# Altium PCB PCB-ESP32-C3-RF-V1.0.PcbDoc (part 2 of 4)
Units mil, origin at the board's own origin, x right, y up, seen from the top; angles counter-clockwise.
Board outline 1166.03 x 1736.03 mil, 4 copper layers (L1, L2, L3, L4), stack 30.315 mil thick; 70 components, 58 nets, 232 pads, 398 vias.
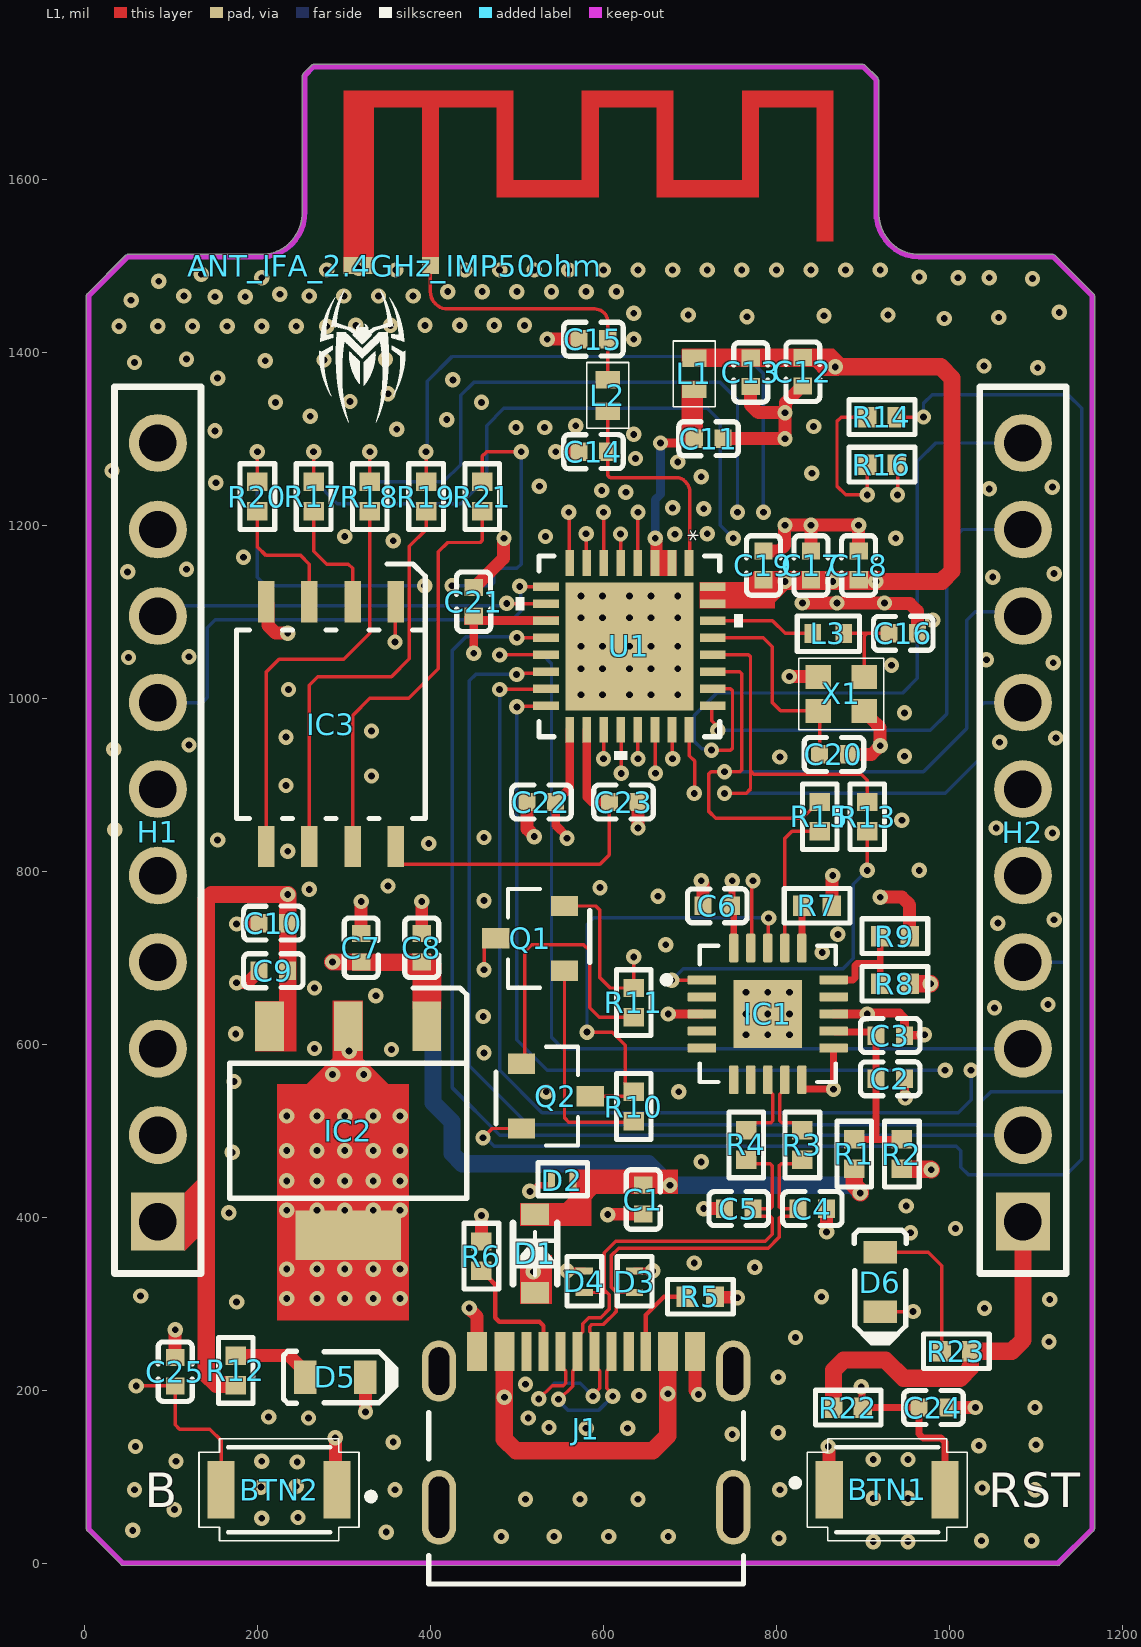
[diagram p0: L1 view]

## Part data (continued)
C18: library part CC0402KRX7R7BB103, "Multilayer Ceramic Capacitors MLCC - SMD/SMT 16V 0.01uF X7R 0402 10%", Case Code (Imperial)=0402, Case Code (Metric)=1005, Dielectric=X7R, Dielectric Material=Ceramic, LCSC Part=C327009, Manufacturer="Yageo Group", Max Operating Temperature=125°C, Min Operating Temperature=-55°C, Supplier Part Number=311-1042-1-ND, Temperature Coefficient=30ppm/°C, Tolerance=10%, Voltage=16V, Case/Package=0402, Category="Ceramic Capacitors", China RoHS=Compliant, ComponentLink1Description=https://datasheet.octopart.com:443/CC0402KRX7R7BB103-Yageo-datasheet-177165144.pdf?src-supplier=IHS, ComponentLink1URL=https://datasheet.octopart.com:443/CC0402KRX7R7BB103-Yageo-datasheet-177165144.pdf?src-supplier=IHS, ComponentLink2Description=https://datasheet.octopart.com:443/CC0402KRX7R7BB103-Yageo-datasheet-78855684.pdf?src-supplier=Upverter, ComponentLink2URL=https://datasheet.octopart.com:443/CC0402KRX7R7BB103-Yageo-datasheet-78855684.pdf?src-supplier=Upverter, ComponentLink3Description=https://datasheet.octopart.com/CC0402KRX7R7BB103-Yageo-datasheet-10883670.pdf, ComponentLink3URL=https://datasheet.octopart.com/CC0402KRX7R7BB103-Yageo-datasheet-10883670.pdf, ComponentLink4Description=https://datasheet.octopart.com:443/CC0402KRX7R7BB103-Yageo-datasheet-147453679.pdf?src-supplier=Newark, ComponentLink4URL=https://datasheet.octopart.com:443/CC0402KRX7R7BB103-Yageo-datasheet-147453679.pdf?src-supplier=Newark, ComponentLink5Description=https://datasheet.octopart.com:443/CC0402KRX7R7BB103-Phycomp-datasheet-499490.pdf?src-supplier=Newark, ComponentLink5URL=https://datasheet.octopart.com:443/CC0402KRX7R7BB103-Phycomp-datasheet-499490.pdf?src-supplier=Newark, ComponentLink6Description=https://datasheet.octopart.com:443/CC0402KRX7R7BB103-Yageo-datasheet-15895757.pdf?src-supplier=Newark, ComponentLink6URL=https://datasheet.octopart.com:443/CC0402KRX7R7BB103-Yageo-datasheet-15895757.pdf?src-supplier=Newark, ComponentLink7Description=https://datasheet.octopart.com:443/CC0402KRX7R7BB103-Yageo-datasheet-182050773.pdf?src-supplier=Newark, ComponentLink7URL=https://datasheet.octopart.com:443/CC0402KRX7R7BB103-Yageo-datasheet-182050773.pdf?src-supplier=Newark, ComponentLink8Description=https://datasheet.octopart.com:443/CC0402KRX7R7BB103-Yageo-datasheet-182050772.pdf?src-supplier=Newark, ComponentLink8URL=https://datasheet.octopart.com:443/CC0402KRX7R7BB103-Yageo-datasheet-182050772.pdf?src-supplier=Newark, ComponentLink9Description=https://datasheet.octopart.com:443/CC0402KRX7R7BB103-Yageo-datasheet-62336348.pdf?src-supplier=Farnell, ComponentLink9URL=https://datasheet.octopart.com:443/CC0402KRX7R7BB103-Yageo-datasheet-62336348.pdf?src-supplier=Farnell, ComponentLink10Description=https://datasheet.octopart.com:443/CC0402KRX7R7BB103-Yageo-datasheet-151948686.pdf?src-supplier=Farnell, ComponentLink10URL=https://datasheet.octopart.com:443/CC0402KRX7R7BB103-Yageo-datasheet-151948686.pdf?src-supplier=Farnell, ComponentLink11Description=https://datasheet.octopart.com:443/CC0402KRX7R7BB103-Phycomp-datasheet-500777.pdf?src-supplier=Farnell, ComponentLink11URL=https://datasheet.octopart.com:443/CC0402KRX7R7BB103-Phycomp-datasheet-500777.pdf?src-supplier=Farnell, ComponentLink12Description=https://datasheet.octopart.com:443/CC0402KRX7R7BB103-Phycomp-datasheet-5301394.pdf?src-supplier=element14, ComponentLink12URL=https://datasheet.octopart.com:443/CC0402KRX7R7BB103-Phycomp-datasheet-5301394.pdf?src-supplier=element14, ComponentLink13Description=https://datasheet.octopart.com:443/CC0402KRX7R7BB103-Yageo-datasheet-8701427.pdf?src-supplier=element14, ComponentLink13URL=https://datasheet.octopart.com:443/CC0402KRX7R7BB103-Yageo-datasheet-8701427.pdf?src-supplier=element14, ComponentLink14Description=https://datasheet.octopart.com:443/CC0402KRX7R7BB103-Yageo-datasheet-166511530.pdf?src-supplier=Future+Electronics, ComponentLink14URL=https://datasheet.octopart.com:443/CC0402KRX7R7BB103-Yageo-datasheet-166511530.pdf?src-supplier=Future+Electronics, ComponentLink15Description=https://datasheet.octopart.com:443/CC0402KRX7R7BB103-Yageo-datasheet-137700085.pdf?src-supplier=Future+Electronics, ComponentLink15URL=https://datasheet.octopart.com:443/CC0402KRX7R7BB103-Yageo-datasheet-137700085.pdf?src-supplier=Future+Electronics, ComponentLink16Description=https://datasheet.octopart.com:443/CC0402KRX7R7BB103-Yageo-datasheet-137700084.pdf?src-supplier=Future+Electronics, ComponentLink16URL=https://datasheet.octopart.com:443/CC0402KRX7R7BB103-Yageo-datasheet-137700084.pdf?src-supplier=Future+Electronics, ComponentLink17Description=https://datasheet.octopart.com:443/CC0402KRX7R7BB103-Yageo-datasheet-27626582.pdf?src-supplier=Future+Electronics, ComponentLink17URL=https://datasheet.octopart.com:443/CC0402KRX7R7BB103-Yageo-datasheet-27626582.pdf?src-supplier=Future+Electronics, ComponentLink18Description=https://datasheet.octopart.com:443/CC0402KRX7R7BB103-Yageo-datasheet-24578986.pdf?src-supplier=Future+Electronics, ComponentLink18URL=https://datasheet.octopart.com:443/CC0402KRX7R7BB103-Yageo-datasheet-24578986.pdf?src-supplier=Future+Electronics, ComponentLink19Description=https://datasheet.octopart.com:443/CC0402KRX7R7BB103-Yageo-datasheet-12526321.pdf?src-supplier=Future+Electronics, ComponentLink19URL=https://datasheet.octopart.com:443/CC0402KRX7R7BB103-Yageo-datasheet-12526321.pdf?src-supplier=Future+Electronics, ComponentLink20Description=https://datasheet.octopart.com:443/CC0402KRX7R7BB103-Yageo-datasheet-10911834.pdf?src-supplier=Future+Electronics, ComponentLink20URL=https://datasheet.octopart.com:443/CC0402KRX7R7BB103-Yageo-datasheet-10911834.pdf?src-supplier=Future+Electronics, ComponentLink21Description=https://datasheet.octopart.com:443/CC0402KRX7R7BB103-Yageo-datasheet-8324442.pdf?src-supplier=Future+Electronics, ComponentLink21URL=https://datasheet.octopart.com:443/CC0402KRX7R7BB103-Yageo-datasheet-8324442.pdf?src-supplier=Future+Electronics, ComponentLink22Description=https://datasheet.octopart.com:443/CC0402KRX7R7BB103-Yageo-Group-datasheet-165992755.pdf?src-supplier=ODG+(Origin+Data+Global), ComponentLink22URL=https://datasheet.octopart.com:443/CC0402KRX7R7BB103-Yageo-Group-datasheet-165992755.pdf?src-supplier=ODG+(Origin+Data+Global), ComponentLink23Description=https://datasheet.octopart.com:443/CC0402KRX7R7BB103-Yageo-datasheet-118396.pdf?src-supplier=DigiKey, ComponentLink23URL=https://datasheet.octopart.com:443/CC0402KRX7R7BB103-Yageo-datasheet-118396.pdf?src-supplier=DigiKey, ComponentLink24Description=http://sigma.octopart.com:80/conflict_mineral_statement/Yageo-company-3.pdf?src-supplier=Compliance+Statements, ComponentLink24URL=http://sigma.octopart.com:80/conflict_mineral_statement/Yageo-company-3.pdf?src-supplier=Compliance+Statements, ComponentLink25Description=http://sigma.octopart.com:80/rohs_statement/Yageo-company-2.pdf?src-supplier=Compliance+Statements, ComponentLink25URL=http://sigma.octopart.com:80/rohs_statement/Yageo-company-2.pdf?src-supplier=Compliance+Statements, Country of Origin="Mainland China, Taiwan", Depth=500µm, Dissipation Factor=3.5%, Export Control Classification Number (ECCN) Code=EAR99, Halogen Free="Halogen Free", Harmonized Tariff Schedule (HTS) Code=8532.24.00.20, Height=500µm, Introduction Date=2003-01-27, Lead Free="Lead Free", Length=1mm, Lifecycle Status=Production, Manufacturer Part Number=CC0402KRX7R7BB103, Material=Ceramic, Mounting Technology="Surface Mount", Number of Terminals=2, Pins=2, Pricing="1=0,1, 10=0,019, 50=0,0124, 100=0,0105, 500=0,00728, 1000=0,0063, 2500=0,00527, 5000=0,00465 (USD)", Radiation Hardening=No, REACH SVHC=Yes, RoHS=Compliant, Schedule B="8532240020, 8532240020|8532240020, 8532240020|8532240020|8532240020, 8532240020|8532240020|8532240020|8532240020", Stock=5468572, Supplier=DigiKey, Termination=SMD/SMT, Thickness=558.8µm, Voltage Rating=16V, Voltage Rating (AC)=16V, Voltage Rating (DC)=16V, Width=500µm
D1: "BAT20J Series 23 V 1 A Surface Mount Switching Schottky Diode - SOD-323", Average Rectified Current=1A, Forward Voltage=310mV, LCSC Part=C155590, Manufacturer=STMicroelectronics, Max Forward Surge Current (Ifsm)=5A, Max Junction Temperature (Tj)=150°C, Max Repetitive Reverse Voltage (Vrrm)=23V, Max Reverse Leakage Current=12µA, Min Operating Temperature=-65°C, Reverse Standoff Voltage=15V, Supplier Part Number=497-3381-1-ND, Category="Schottky Diodes", China RoHS=Compliant, ComponentLink1Description=https://datasheet.octopart.com:443/BAT20JFILM-STMicroelectronics-datasheet-21217136.pdf?src-supplier=Upverter, ComponentLink1URL=https://datasheet.octopart.com:443/BAT20JFILM-STMicroelectronics-datasheet-21217136.pdf?src-supplier=Upverter, ComponentLink2Description=https://datasheet.octopart.com:443/BAT20JFILM-STMicroelectronics-datasheet-568812.pdf?src-supplier=STMicroelectronics, ComponentLink2URL=https://datasheet.octopart.com:443/BAT20JFILM-STMicroelectronics-datasheet-568812.pdf?src-supplier=STMicroelectronics, ComponentLink3Description=https://datasheet.octopart.com:443/BAT20JFILM-STMicroelectronics-datasheet-74075.pdf?src-supplier=DigiKey, ComponentLink3URL=https://datasheet.octopart.com:443/BAT20JFILM-STMicroelectronics-datasheet-74075.pdf?src-supplier=DigiKey, ComponentLink4Description=https://datasheet.octopart.com:443/BAT20JFILM-STMicroelectronics-datasheet-14054137.pdf?src-supplier=iiiC, ComponentLink4URL=https://datasheet.octopart.com:443/BAT20JFILM-STMicroelectronics-datasheet-14054137.pdf?src-supplier=iiiC, Country of Origin="Mainland China", Current Rating=1A, Element Configuration=Single, Export Control Classification Number (ECCN) Code=EAR99, Forward Current=1A, Harmonized Tariff Schedule (HTS) Code=8541.10.00.80, Height=1.13mm, Introduction Date=2004-04-02, Lead Free="Lead Free", Length=1.8mm, Lifecycle Status=Production, Manufacturer Part Number=BAT20JFILM, Max Operating Temperature=150°C, Max Output current=1A, Max Reverse Voltage (DC)=23V, Max Surge Current=5A, Mounting Technology="Surface Mount", Number of Elements=1, Number of Terminals=2, Output Current=1A, Packaging="Tape and Reel", Peak Non-Repetitive Surge Current=5A, Peak Reverse Current=12µA, Pins=2, Polarity=Standard, Pricing="1=0,34, 10=0,206, 100=0,129, 500=0,09552, 1000=0,08468 (USD)", Radiation Hardening=No, REACH SVHC=Yes, RoHS=Compliant, Schedule B="8541100080, 8541100080|8541100080|8541100080|8541100080|8541100080", Stock=647, Supplier=DigiKey, Voltage Rating (DC)=23V, Weight=4.535924g, Width=1.35mm
D2 D3 D4: library part AQ3045-01ETG, "Bi 30Kv 5V 0.35Pf Automotve Tvs Sod882/ T&r Rohs Compliant: Yes", Breakdown Voltage=7.8V, Clamping Voltage=12V, Leakage Current=100nA, Manufacturer=Littelfuse, Max Breakdown Voltage=9V, Max Operating Temperature=150°C, Min Breakdown Voltage=6.8V, Min Operating Temperature=-40°C, Operating Supply Voltage=5.3V, Peak Pulse Power=40W, Ratings=AEC-Q101, Supplier Part Number=F9321CT-ND, Category="TVS Diodes", ComponentLink1Description=https://datasheet.octopart.com:443/AQ3045-01ETG-Littelfuse-datasheet-180606588.pdf?src-supplier=IHS, ComponentLink1URL=https://datasheet.octopart.com:443/AQ3045-01ETG-Littelfuse-datasheet-180606588.pdf?src-supplier=IHS, ComponentLink2Description=https://datasheet.octopart.com:443/AQ3045-01ETG-Littelfuse-datasheet-140480283.pdf?src-supplier=ODG+(Origin+Data+Global), ComponentLink2URL=https://datasheet.octopart.com:443/AQ3045-01ETG-Littelfuse-datasheet-140480283.pdf?src-supplier=ODG+(Origin+Data+Global), ComponentLink3Description=https://datasheet.octopart.com:443/AQ3045-01ETG-Littelfuse-datasheet-101609968.pdf?src-supplier=Farnell, ComponentLink3URL=https://datasheet.octopart.com:443/AQ3045-01ETG-Littelfuse-datasheet-101609968.pdf?src-supplier=Farnell, ComponentLink4Description=https://datasheet.octopart.com:443/AQ3045-01ETG-Littelfuse-datasheet-183003566.pdf?src-supplier=JRH+Electronics, ComponentLink4URL=https://datasheet.octopart.com:443/AQ3045-01ETG-Littelfuse-datasheet-183003566.pdf?src-supplier=JRH+Electronics, ComponentLink5Description=https://datasheet.octopart.com:443/AQ3045-01ETG-Littelfuse-datasheet-170904929.pdf?src-supplier=Future+Electronics, ComponentLink5URL=https://datasheet.octopart.com:443/AQ3045-01ETG-Littelfuse-datasheet-170904929.pdf?src-supplier=Future+Electronics, Lifecycle Status=Production, Manufacturer Part Number=AQ3045-01ETG, Mounting Technology="Surface Mount", Number of Channels=1, Number of Elements=1, Number of Terminals=2, Packaging="Cut Tape", Peak Reverse Current=100nA, Polarity=Bidirectional, Pricing="1=0,69, 10=0,424, 100=0,2714, 500=0,20548, 1000=0,18418, 2000=0,16625, 5000=0,14682 (USD)", REACH SVHC=Yes, Reverse Standoff Voltage=5.3V, RoHS=Compliant, Stock=799, Supplier=DigiKey
D5: "LED red 0805 wavelength 631nm light intensity 54mcd Front Mounting", Case Code (Imperial)=0805, Case Code (Metric)=2012, Color=Red, Forward Current=30mA, Forward Voltage=2V, LCSC Part=C284871, Lens Color="Clear, Colorless", Manufacturer="Diodes Inc.", Max Operating Temperature=85°C, Min Operating Temperature=-55°C, Power Dissipation=75mW, Reverse Voltage=5V, Supplier Part Number=160-1427-1-ND, Test Current=20mA, Case/Package=0805, Category=LEDs, China RoHS=Compliant, ComponentLink1Description=https://datasheet.octopart.com:443/LTST-C171KRKT-Lite-On-datasheet-32046998.pdf?src-supplier=ODG+(Origin+Data+Global), ComponentLink1URL=https://datasheet.octopart.com:443/LTST-C171KRKT-Lite-On-datasheet-32046998.pdf?src-supplier=ODG+(Origin+Data+Global), ComponentLink2Description=https://datasheet.octopart.com:443/LTST-C171KRKT-Lite-On-datasheet-180605162.pdf?src-supplier=IHS, ComponentLink2URL=https://datasheet.octopart.com:443/LTST-C171KRKT-Lite-On-datasheet-180605162.pdf?src-supplier=IHS, ComponentLink3Description=https://datasheet.octopart.com:443/LTST-C171KRKT-Lite-On-datasheet-166436.pdf?src-supplier=_legacy+Avnet, ComponentLink3URL=https://datasheet.octopart.com:443/LTST-C171KRKT-Lite-On-datasheet-166436.pdf?src-supplier=_legacy+Avnet, ComponentLink4Description=https://datasheet.octopart.com:443/LTST-C171KRKT-Lite-On-datasheet-166322636.pdf?src-supplier=TME, ComponentLink4URL=https://datasheet.octopart.com:443/LTST-C171KRKT-Lite-On-datasheet-166322636.pdf?src-supplier=TME, ComponentLink5Description=https://datasheet.octopart.com:443/LTST-C171KRKT-Lite-On-datasheet-165573808.pdf?src-supplier=TME, ComponentLink5URL=https://datasheet.octopart.com:443/LTST-C171KRKT-Lite-On-datasheet-165573808.pdf?src-supplier=TME, ComponentLink6Description=https://datasheet.octopart.com:443/LTST-C171KRKT-Lite-On-datasheet-8330373.pdf?src-supplier=Future+Electronics, ComponentLink6URL=https://datasheet.octopart.com:443/LTST-C171KRKT-Lite-On-datasheet-8330373.pdf?src-supplier=Future+Electronics, ComponentLink7Description=https://datasheet.octopart.com:443/LTST-C171KRKT-Lite-On-datasheet-62737.pdf?src-supplier=DigiKey, ComponentLink7URL=https://datasheet.octopart.com:443/LTST-C171KRKT-Lite-On-datasheet-62737.pdf?src-supplier=DigiKey, Depth=1.25mm, Dominant Wavelength=631nm, Harmonized Tariff Schedule (HTS) Code=8541.40.20.00, Height=800µm, Illumination Color=Red, Introduction Date=2001-04-27, Lead Free="Lead Free", Length=2mm, Lens Style=Clear, Lens Transparency=Clear, Lifecycle Status=Production, Luminous Intensity=54mcd, Manufacturer Part Number=LTST-C171KRKT, Mounting Technology="Surface Mount", Number of Circuits=1, Number of Elements=1, Number of LEDs=1, Number of Terminals=2, Peak Wavelength=639nm, Pins=2, Power Rating=75mW, Pricing="1=0,14, 10=0,095, 100=0,0654, 500=0,05166, 1000=0,04709 (USD)", Radiation Hardening=No, REACH SVHC=Yes, RoHS=Compliant, Schedule B="8541402000, 8541402000|8541402000|8541402000|8541402000|8541402000", Shape=Rectangular, Stock=458682, Supplier=DigiKey, Terminal Pitch=2.5mm, Viewing Angle=130°, Wavelength=631nm, Width=1.25mm
D6: library part LTST-C171TBKT, "LED blue LED0805 wavelength 465~475nm light intensity 28~180mcd vertical sticker", Case Code (Imperial)=0805, Case Code (Metric)=2012, Color=Blue, Forward Current=20mA, Forward Voltage=3.8V, LCSC Part=C98225, Lens Color="Clear, Colorless", Manufacturer="Diodes Inc.", Max Operating Temperature=80°C, Min Operating Temperature=-20°C, Power Dissipation=76mW, Reverse Voltage=5V, Supplier Part Number=160-1645-1-ND, Case/Package=0805, Category=LEDs, China RoHS=Compliant, ComponentLink1Description=https://datasheet.octopart.com:443/LTST-C171TBKT-Lite-On-datasheet-26684740.pdf?src-supplier=ODG+(Origin+Data+Global), ComponentLink1URL=https://datasheet.octopart.com:443/LTST-C171TBKT-Lite-On-datasheet-26684740.pdf?src-supplier=ODG+(Origin+Data+Global), ComponentLink2Description=https://datasheet.octopart.com:443/LTST-C171TBKT-Lite-On-datasheet-180605166.pdf?src-supplier=IHS, ComponentLink2URL=https://datasheet.octopart.com:443/LTST-C171TBKT-Lite-On-datasheet-180605166.pdf?src-supplier=IHS, ComponentLink3Description=https://datasheet.octopart.com:443/LTST-C171TBKT-Lite-On-datasheet-91253.pdf?src-supplier=Future+Electronics, ComponentLink3URL=https://datasheet.octopart.com:443/LTST-C171TBKT-Lite-On-datasheet-91253.pdf?src-supplier=Future+Electronics, ComponentLink4Description=https://datasheet.octopart.com:443/LTST-C171TBKT-Lite-On-datasheet-166322636.pdf?src-supplier=TME, ComponentLink4URL=https://datasheet.octopart.com:443/LTST-C171TBKT-Lite-On-datasheet-166322636.pdf?src-supplier=TME, ComponentLink5Description=https://datasheet.octopart.com:443/LTST-C171TBKT-Lite-On-datasheet-165573808.pdf?src-supplier=TME, ComponentLink5URL=https://datasheet.octopart.com:443/LTST-C171TBKT-Lite-On-datasheet-165573808.pdf?src-supplier=TME, ComponentLink6Description=https://datasheet.octopart.com:443/LTST-C171TBKT-Lite-On-datasheet-13703740.pdf?src-supplier=_legacy+Avnet, ComponentLink6URL=https://datasheet.octopart.com:443/LTST-C171TBKT-Lite-On-datasheet-13703740.pdf?src-supplier=_legacy+Avnet, ComponentLink7Description=https://datasheet.octopart.com:443/LTST-C171TBKT-Lite-On-datasheet-158537.pdf?src-supplier=Mouser, ComponentLink7URL=https://datasheet.octopart.com:443/LTST-C171TBKT-Lite-On-datasheet-158537.pdf?src-supplier=Mouser, Depth=1.25mm, Dominant Wavelength=475nm, Export Control Classification Number (ECCN) Code=EAR99, Harmonized Tariff Schedule (HTS) Code=8541.40.20.00, Height=800µm, Illumination Color=Blue, Introduction Date=2001-10-22, Lead Free="Lead Free", Length=2mm, Lens Style=Clear, Lens Transparency=Clear, Lifecycle Status=Production, Luminous Intensity=30mcd, Manufacturer Part Number=LTST-C171TBKT, Mounting Technology="Surface Mount", Number of Circuits=1, Number of Elements=1, Number of LEDs=1, Number of Terminals=2, Peak Wavelength=468nm, Pins=2, Pricing="1=0,21, 10=0,145, 100=0,1008, 500=0,08064, 1000=0,07393 (USD)", Radiation Hardening=No, REACH SVHC=Yes, RoHS=Compliant, Schedule B="8541402000, 8541402000|8541402000|8541402000|8541402000|8541402000", Shape=Rectangular, Stock=36169, Supplier=DigiKey, Terminal Pitch=2.5mm, Test Current=20mA, Viewing Angle=130°, Wavelength=475nm, Width=1.25mm
H1 H2: library part PH1-10-UA, "Conn Unshrouded Header HDR 10 POS 2.54mm Solder ST Top Entry Thru-Hole Bag", Contact Resistance=20mΩ, Current Rating=3A, Insulation Resistance=5GΩ, LCSC Part=C3330527, Manufacturer="Adam Tech", Max Operating Temperature=105°C, Min Operating Temperature=-40°C, Supplier Part Number=2057-PH1-10-UA-ND, Voltage Rating=250V, Category="Headers and Wire Housings", ComponentLink1Description=https://datasheet.octopart.com:443/PH1-10-UA-Adam-Tech-datasheet-21182886.pdf?src-supplier=IHS, ComponentLink1URL=https://datasheet.octopart.com:443/PH1-10-UA-Adam-Tech-datasheet-21182886.pdf?src-supplier=IHS, ComponentLink2Description=https://datasheet.octopart.com:443/PH1-10-UA-Adam-Tech-datasheet-189096092.pdf?src-supplier=Master+Electronics, ComponentLink2URL=https://datasheet.octopart.com:443/PH1-10-UA-Adam-Tech-datasheet-189096092.pdf?src-supplier=Master+Electronics, ComponentLink3Description=http://sigma.octopart.com:80/reach_statement/Adam-Tech-company-23.pdf?src-supplier=Compliance+Statements, ComponentLink3URL=http://sigma.octopart.com:80/reach_statement/Adam-Tech-company-23.pdf?src-supplier=Compliance+Statements, ComponentLink4Description=http://sigma.octopart.com:80/rohs_statement/Adam-Tech-company-22.pdf?src-supplier=Compliance+Statements, ComponentLink4URL=http://sigma.octopart.com:80/rohs_statement/Adam-Tech-company-22.pdf?src-supplier=Compliance+Statements, Contact Gender=Male, Contact Material=Brass, Export Control Classification Number (ECCN) Code=EAR99, Harmonized Tariff Schedule (HTS) Code=8536.69.40.40, Height=9.2456mm, Introduction Date=2004-11-19, Lifecycle Status=Production, Manufacturer Part Number=PH1-10-UA, Number of Contacts=10, Number of Rows=1, Pins=10, Pitch=2.54mm, Pricing="1=0,14, 10=0,117, 100=0,0993, 500=0,0886, 1000=0,08436, 5000=0,07529, 10000=0,0717 (USD)", REACH SVHC=Yes, RoHS=Compliant, Schedule B="8536694040, 8536694040|8536694040|8536694040|8536694040|8536694040", Stock=3314, Supplier=DigiKey, Terminal Pitch=2.54mm, Termination=PCB
IC1: library part FT231XQ-R, "Tape & Reel (TR) 2006 UART USB 2.0 interface controller 3.3V~5V 4mm 8mA 12Mbps", Ambient Temperature Range High=85°C, Case/Package=QFN, Clock Frequency=12.02MHz, LCSC Part=C132159, Manufacturer=FTDI, Max Supply Current=8.4mA, Max Supply Voltage=5.5V, Min Operating Temperature=-40°C, Min Supply Voltage=2.97V, Operating Supply Current=8mA, Operating Supply Voltage=5V, Supplier Part Number=768-1128-6-ND, Category="UART Interface ICs", ComponentLink1Description=https://datasheet.octopart.com:443/FT231XQ-R-FTDI-datasheet-182343132.pdf?src-supplier=IHS, ComponentLink1URL=https://datasheet.octopart.com:443/FT231XQ-R-FTDI-datasheet-182343132.pdf?src-supplier=IHS, ComponentLink2Description=https://datasheet.octopart.com:443/FT231XQ-R-FTDI-datasheet-11021087.pdf?src-supplier=HQonline, ComponentLink2URL=https://datasheet.octopart.com:443/FT231XQ-R-FTDI-datasheet-11021087.pdf?src-supplier=HQonline, ComponentLink3Description=https://datasheet.octopart.com:443/FT231XQ-R-FTDI-datasheet-28834672.pdf?src-supplier=SOS+electronic, ComponentLink3URL=https://datasheet.octopart.com:443/FT231XQ-R-FTDI-datasheet-28834672.pdf?src-supplier=SOS+electronic, ComponentLink4Description=https://datasheet.octopart.com:443/FT231XQ-R-FTDI-datasheet-68321328.pdf?src-supplier=TME, ComponentLink4URL=https://datasheet.octopart.com:443/FT231XQ-R-FTDI-datasheet-68321328.pdf?src-supplier=TME, ComponentLink5Description=https://datasheet.octopart.com:443/FT231XQ-R-FTDI-datasheet-134530624.pdf?src-supplier=SHENGYU+ELECTRONICS, ComponentLink5URL=https://datasheet.octopart.com:443/FT231XQ-R-FTDI-datasheet-134530624.pdf?src-supplier=SHENGYU+ELECTRONICS, Data Rate=12Mbps, Height=800µm, Height - Seated (Max)=800µm, Interface="UART, USB", Lead Free="Lead Free", Length=4mm, Lifecycle Status=Production, Manufacturer Part Number=FT231XQ-R, Max Operating Temperature=85°C, Mounting Technology="Surface Mount", Number of Channels=1, Number of Terminals=20, Pins=20, Pricing="1=2,34, 25=2,27, 100=2,2, 250=2,15728 (USD)", REACH SVHC=Yes, RoHS=Compliant, Supplier=DigiKey, Terminal Pitch=500µm, Weight=123.008581mg, Width=4mm
IC2: library part TL1963A-33DCYR, "1.5-A, 20-V, low-dropout voltage regulator with reverse current & reverse voltage protection", Case/Package=SOT-223, Dropout Voltage=340mV, Input Bias Current=1mA, LCSC Part=C181262, Manufacturer="Texas Instruments", Manufacturer Lifecycle Status=ACTIVE, Max Operating Temperature=125°C, Max Output current=1.5A, Max Output Voltage=3.3V, Max Supply Voltage=20V, Min Current Limit=1.6A, Min Input Voltage=2.1V, Min Operating Temperature=-40°C, Supplier Part Number=296-24897-1-ND, Accuracy=3%, Category="LDO Voltage Regulators", ComponentLink1Description=https://datasheet.octopart.com:443/TL1963A-33DCYR-Texas-Instruments-datasheet-36835243.pdf?src-supplier=Texas+Instruments, ComponentLink1URL=https://datasheet.octopart.com:443/TL1963A-33DCYR-Texas-Instruments-datasheet-36835243.pdf?src-supplier=Texas+Instruments, ComponentLink2Description=https://octopart.com:443/opatz8j6/c1?t=7938p2E3hGtuvHzh9uHcbOE5IwUpsRN-RdG1IUqPLYTTLry58Rz3JrkoHs6IlnodGiq_SyHcsYE8_Yj2nv1Vtm2McBApcjkJ3i2b_UV4sputvC-svH2_pBXtERMEpYdJjfjKiWY5noZvapJNMuyk2r72vCZUkuO_NLHyx28lqVAXlT-uTdOnRyi7f2n6IwJCiFrgBSQJBT-G-mBlbL0jlLDMNesjC18A_jYAqbmg2UmLweNv_teCPX79kEG8XqHKKE12xrxd8PYo_986hnTHEUdOYLheK1slTJPpHPsK5iSoTy6isz2ik9VnP4NT5e2z6ajpL_25YAojLgXHAMtCFDAE6j9rWpr-HtqPwK26aqEOm2qqYeeip_d_zo531nqux4KxS2U&src-supplier=Texas+Instruments, ComponentLink2URL=https://octopart.com:443/opatz8j6/c1?t=7938p2E3hGtuvHzh9uHcbOE5IwUpsRN-RdG1IUqPLYTTLry58Rz3JrkoHs6IlnodGiq_SyHcsYE8_Yj2nv1Vtm2McBApcjkJ3i2b_UV4sputvC-svH2_pBXtERMEpYdJjfjKiWY5noZvapJNMuyk2r72vCZUkuO_NLHyx28lqVAXlT-uTdOnRyi7f2n6IwJCiFrgBSQJBT-G-mBlbL0jlLDMNesjC18A_jYAqbmg2UmLweNv_teCPX79kEG8XqHKKE12xrxd8PYo_986hnTHEUdOYLheK1slTJPpHPsK5iSoTy6isz2ik9VnP4NT5e2z6ajpL_25YAojLgXHAMtCFDAE6j9rWpr-HtqPwK26aqEOm2qqYeeip_d_zo531nqux4KxS2U&src-supplier=Texas+Instruments, ComponentLink3Description=https://datasheet.octopart.com:443/TL1963A-33DCYR-Texas-Instruments-datasheet-10255270.pdf?src-supplier=Texas+Instruments, ComponentLink3URL=https://datasheet.octopart.com:443/TL1963A-33DCYR-Texas-Instruments-datasheet-10255270.pdf?src-supplier=Texas+Instruments, ComponentLink4Description=https://sigma.octopart.com:443/49253063/technical_drawing/Texas-Instruments-TL1963A-33DCYR.pdf?src-supplier=Texas+Instruments, ComponentLink4URL=https://sigma.octopart.com:443/49253063/technical_drawing/Texas-Instruments-TL1963A-33DCYR.pdf?src-supplier=Texas+Instruments, ComponentLink5Description=https://datasheet.octopart.com:443/TL1963A-33DCYR-Texas-Instruments-datasheet-159117591.pdf?src-supplier=Augswan, ComponentLink5URL=https://datasheet.octopart.com:443/TL1963A-33DCYR-Texas-Instruments-datasheet-159117591.pdf?src-supplier=Augswan, ComponentLink6Description=https://datasheet.octopart.com:443/TL1963A-33DCYR-Texas-Instruments-datasheet-21820479.pdf?src-supplier=Newark, ComponentLink6URL=https://datasheet.octopart.com:443/TL1963A-33DCYR-Texas-Instruments-datasheet-21820479.pdf?src-supplier=Newark, ComponentLink7Description=https://datasheet.octopart.com:443/TL1963A-33DCYR-Texas-Instruments-datasheet-16079880.pdf?src-supplier=Farnell, ComponentLink7URL=https://datasheet.octopart.com:443/TL1963A-33DCYR-Texas-Instruments-datasheet-16079880.pdf?src-supplier=Farnell, ComponentLink8Description=https://datasheet.octopart.com:443/TL1963A-33DCYR-Texas-Instruments-datasheet-14171511.pdf?src-supplier=iiiC, ComponentLink8URL=https://datasheet.octopart.com:443/TL1963A-33DCYR-Texas-Instruments-datasheet-14171511.pdf?src-supplier=iiiC, ComponentLink9Description=http://sigma.octopart.com:80/reach_statement/Texas-Instruments-company-64.pdf?src-supplier=Compliance+Statements, ComponentLink9URL=http://sigma.octopart.com:80/reach_statement/Texas-Instruments-company-64.pdf?src-supplier=Compliance+Statements, ComponentLink10Description=http://sigma.octopart.com:80/conflict_mineral_statement/Texas-Instruments-company-63.pdf?src-supplier=Compliance+Statements, ComponentLink10URL=http://sigma.octopart.com:80/conflict_mineral_statement/Texas-Instruments-company-63.pdf?src-supplier=Compliance+Statements, Contact Plating=Tin, Height=1.8mm, Lead Free="Lead Free", Length=6.5mm, Lifecycle Status=Production, Manufacturer Part Number=TL1963A-33DCYR, Min Output Voltage=3.3V, Nominal Output Voltage=3.3V, Number of Outputs=1, Number of Regulators=1, Output Current=1.5A, Output Type=Fixed, Output Voltage=3.3V, Pins=4, Polarity=Positive, Pricing="1=3,22, 10=2,414, 25=2,212, 100=1,9903, 250=1,88444, 500=1,85588 (USD)", Quiescent Current=1mA, Radiation Hardening=No, REACH SVHC=No, RoHS=Compliant, Schedule B="8542390000, 8542390000|8542390000|8542390000|8542390000|8542390000", Stock=4264, Supplier=DigiKey, Thickness=1.6mm, Width=3.5mm
IC3: library part "W25Q32JVSSIQ TR", "NOR Flash Serial (SPI, Dual SPI, Quad SPI) 3V/3.3V 32M-bit 4M x 8 6ns 8-Pin SOIC T/R", Case/Package=SOIC, Frequency=104MHz, LCSC Part=C179173, Manufacturer=Winbond, Max Operating Temperature=85°C, Min Operating Temperature=-40°C, Supplier Part Number=256-W25Q32JVSSIQTRCT-ND, Category=Flash, ComponentLink1Description=https://datasheet.octopart.com:443/W25Q32JVSSIQ-TR-Winbond-datasheet-113071625.pdf?src-supplier=ODG+(Origin+Data+Global), ComponentLink1URL=https://datasheet.octopart.com:443/W25Q32JVSSIQ-TR-Winbond-datasheet-113071625.pdf?src-supplier=ODG+(Origin+Data+Global), Interface="SPI, Serial", Manufacturer Part Number="W25Q32JVSSIQ TR", Memory Format="FLASH, NOR", Pricing="1=1,02, 10=0,961, 25=0,9348, 50=0,9148, 100=0,8944, 250=0,86748, 500=0,84706, 1000=0,82672, 2000=0,6452, 4000=0,62918, 6000=0,61991, 10000=0,60834, 14000=0,60081 (USD)", RoHS=Compliant, Schedule B="8542320070, 8542320070|8542320070|8542320070|8542320070|8542320070|8542320070|8542320070|8542320070|8542320070|8542320070|8542320070|8542320070|8542320070|8542320070|8542320070|8542320070|8542320070|8542320070|8542320070|8542320070|8542320070|8542320070|8542320070|85", Supplier=DigiKey
J1: library part 217179-0001, "USB Connector, USB Type C, USB 2.0, Receptacle, 16 Ways, Surface Mount, Through Hole Mount", Contact Resistance=50mΩ, Current Rating=1.25A, Dielectric Material=Polyamide, Insulation Resistance=100MΩ, LCSC Part=2171790001, Manufacturer=Molex, Max Operating Temperature=85°C, Min Operating Temperature=-40°C, Supplier Part Number=900-2171790001DKR-ND, Voltage Rating=30V, Category="USB Connectors", China RoHS=Compliant, ComponentLink1Description=https://datasheet.octopart.com:443/217179-0001-Molex-datasheet-158871109.pdf?src-supplier=ODG+(Origin+Data+Global), ComponentLink1URL=https://datasheet.octopart.com:443/217179-0001-Molex-datasheet-158871109.pdf?src-supplier=ODG+(Origin+Data+Global), ComponentLink2Description=https://sigma.octopart.com:443/158871110/technical_drawing/Molex-217179-0001.pdf?src-supplier=Upverter, ComponentLink2URL=https://sigma.octopart.com:443/158871110/technical_drawing/Molex-217179-0001.pdf?src-supplier=Upverter, ComponentLink3Description=https://datasheet.octopart.com:443/217179-0001-Molex-datasheet-164573281.pdf?src-supplier=RS+(Formerly+Allied+Electronics), ComponentLink3URL=https://datasheet.octopart.com:443/217179-0001-Molex-datasheet-164573281.pdf?src-supplier=RS+(Formerly+Allied+Electronics), ComponentLink4Description=http://sigma.octopart.com:80/reach_statement/Molex-company-74.pdf?src-supplier=Compliance+Statements, ComponentLink4URL=http://sigma.octopart.com:80/reach_statement/Molex-company-74.pdf?src-supplier=Compliance+Statements, ComponentLink5Description=http://sigma.octopart.com:80/rohs_statement/Molex-company-73.pdf?src-supplier=Compliance+Statements, ComponentLink5URL=http://sigma.octopart.com:80/rohs_statement/Molex-company-73.pdf?src-supplier=Compliance+Statements, ComponentLink6Description=http://sigma.octopart.com:80/conflict_mineral_statement/Molex-company-72.pdf?src-supplier=Compliance+Statements, ComponentLink6URL=http://sigma.octopart.com:80/conflict_mineral_statement/Molex-company-72.pdf?src-supplier=Compliance+Statements, Contact Gender=Female, Contact Material="Gold, Nickel", Country of Origin="Mainland China", Export Control Classification Number (ECCN) Code=EAR99, Gender=Receptacle, Harmonized Tariff Schedule (HTS) Code=8536.69.40.30, Height=3.36mm, Introduction Date=2021-08-30, Lifecycle Status=Production, Manufacturer Part Number=217179-0001, Number of Contacts=16, Number of Ports=1, Number of Rows=1, Pins=16, Pricing="1=0,83, 10=0,704, 25=0,6596, 50=0,628, 100=0,598, 250=0,56052, 500=0,53374 (USD)", REACH SVHC=Yes, RoHS=Compliant, Shell Finish=Nickel, Shell Material="Stainless Steel", Stock=39285, Supplier=DigiKey, Terminal Pitch=500µm, USB Standard="USB 2.0"
L1 L2: library part LQW15AN2N2G80D, "General Purpose Inductor, 0.0022uH, 2%, 1 Element, Wirewound-Core, Reflow soldering, 1005/0402", Case/Package=0402, Current Rating=2.53A, DC Resistance (DCR)=22mΩ, Manufacturer=Murata, Manufacturer Lifecycle Status="IN PRODUCTION", Max Operating Temperature=125°C, Min Operating Temperature=-55°C, Self Resonant Frequency=15.5GHz, Supplier Part Number=490-LQW15AN2N2G80DCT-ND, Test Frequency=250MHz, Tolerance=2%, Category="Fixed Inductors", ComponentLink1Description=https://datasheet.octopart.com:443/LQW15AN2N2G80D-Murata-datasheet-140317598.pdf?src-supplier=element14+APAC, ComponentLink1URL=https://datasheet.octopart.com:443/LQW15AN2N2G80D-Murata-datasheet-140317598.pdf?src-supplier=element14+APAC, ComponentLink2Description=https://datasheet.octopart.com:443/LQW15AN2N2G80D-Murata-datasheet-142541253.pdf?src-supplier=Ciiva, ComponentLink2URL=https://datasheet.octopart.com:443/LQW15AN2N2G80D-Murata-datasheet-142541253.pdf?src-supplier=Ciiva, ComponentLink3Description=https://datasheet.octopart.com:443/LQW15AN2N2G80D-Murata-datasheet-141266224.pdf?src-supplier=Ciiva, ComponentLink3URL=https://datasheet.octopart.com:443/LQW15AN2N2G80D-Murata-datasheet-141266224.pdf?src-supplier=Ciiva, ComponentLink4Description=https://datasheet.octopart.com:443/LQW15AN2N2G80D-Murata-datasheet-140716489.pdf?src-supplier=Ciiva, ComponentLink4URL=https://datasheet.octopart.com:443/LQW15AN2N2G80D-Murata-datasheet-140716489.pdf?src-supplier=Ciiva, ComponentLink5Description=https://datasheet.octopart.com:443/LQW15AN2N2G80D-Murata-datasheet-138757552.pdf?src-supplier=Ciiva, ComponentLink5URL=https://datasheet.octopart.com:443/LQW15AN2N2G80D-Murata-datasheet-138757552.pdf?src-supplier=Ciiva, ComponentLink6Description=https://datasheet.octopart.com:443/LQW15AN2N2G80D-Murata-datasheet-145451984.pdf?src-supplier=Geoflip, ComponentLink6URL=https://datasheet.octopart.com:443/LQW15AN2N2G80D-Murata-datasheet-145451984.pdf?src-supplier=Geoflip, ComponentLink7Description=https://datasheet.octopart.com:443/LQW15AN2N2G80D-Murata-datasheet-140569559.pdf?src-supplier=Arrow.cn, ComponentLink7URL=https://datasheet.octopart.com:443/LQW15AN2N2G80D-Murata-datasheet-140569559.pdf?src-supplier=Arrow.cn, ComponentLink8Description=http://sigma.octopart.com:80/reach_statement/Murata-company-16.pdf?src-supplier=Compliance+Statements, ComponentLink8URL=http://sigma.octopart.com:80/reach_statement/Murata-company-16.pdf?src-supplier=Compliance+Statements, Composition=Wirewound, Core Material=Non-Magnetic, Country of Origin="Japan, Malaysia", ESR=22mΩ, Export Control Classification Number (ECCN) Code=EAR99, Harmonized Tariff Schedule (HTS) Code=8504.50.80.00, Height=500µm, Introduction Date=2014-04-19, Length=1mm, Lifecycle Status=Production, Manufacturer Part Number=LQW15AN2N2G80D, Max Current Rating=2.53A, Number of Circuits=1, Number of Terminals=2, Pricing="1=0,16, 10=0,136, 25=0,1256, 50=0,1184, 100=0,1116, 250=0,10324, 500=0,09734, 1000=0,09176, 2500=0,0849 (USD)", Q Factor=30, REACH SVHC=Yes, RMS Current (Irms)=2.53A, RoHS=Compliant, Schedule B="8504500000, 8504500000|8504500000|8504500000|8504500000|8504500000", Shielding=Unshielded, Stock=2001, Supplier=DigiKey, Width=600µm
L3: library part LRC0402CJ27NGV001T, "General Purpose Inductor, 0.027uH, 5%, 1 Element, Ceramic-Core, SMD, 0402", Case/Package=0402, DC Resistance (DCR)=900mΩ, LCSC Part=C17449954, Manufacturer=Knowles, Max Current Rating=200mA, Max Operating Temperature=100°C, Min Operating Temperature=-55°C, Self Resonant Frequency=1.9GHz, Supplier Part Number=712-LRC0402CJ27NGV001TCT-ND, Test Frequency=100MHz, Tolerance=5%, Category="Fixed Inductors", ComponentLink1Description=https://datasheet.octopart.com:443/LRC0402CJ27NGV001T-Johanson-datasheet-187814626.pdf?src-supplier=IHS, ComponentLink1URL=https://datasheet.octopart.com:443/LRC0402CJ27NGV001T-Johanson-datasheet-187814626.pdf?src-supplier=IHS, ComponentLink2Description=https://datasheet.octopart.com:443/LRC0402CJ27NGV001T-Johanson-datasheet-183008488.pdf?src-supplier=RFMW, ComponentLink2URL=https://datasheet.octopart.com:443/LRC0402CJ27NGV001T-Johanson-datasheet-183008488.pdf?src-supplier=RFMW, ComponentLink3Description=https://datasheet.octopart.com:443/LRC0402CJ27NGV001T-Johanson-datasheet-98397494.pdf?src-supplier=RFMW, ComponentLink3URL=https://datasheet.octopart.com:443/LRC0402CJ27NGV001T-Johanson-datasheet-98397494.pdf?src-supplier=RFMW, Core Material=Ceramic, Country of Origin=Taiwan, Export Control Classification Number (ECCN) Code=EAR99, Harmonized Tariff Schedule (HTS) Code=8504.50.40.00, Height=500µm, Introduction Date=2018-06-27, Length=1mm, Lifecycle Status=Production, Manufacturer Part Number=LRC0402CJ27NGV001T, Number of Circuits=1, Number of Terminals=2, Pricing="1=0,1, 10=0,031, 100=0,0257, 1000=0,02116, 5000=0,01845 (USD)", Q Factor=8, REACH SVHC=Yes, RoHS=Compliant, Shielding=Unshielded, Stock=583004, Supplier=DigiKey, Width=500µm
Q1 Q2: library part SS8050-G, "TRANS NPN 25V 1.5A SOT23-3 / Bipolar (BJT) Transistor NPN 25 V 1.5 A 100MHz 300 mW Surface Mount SOT-23-3", Case/Package=TO-236-3, Collector Base Voltage (VCBO)=40V, Collector Emitter Breakdown Voltage=25V, Collector Emitter Saturation Voltage=500mV, Emitter Base Voltage (VEBO)=5V, LCSC Part=C3199946, Manufacturer=Comchip, Max Collector Current=1.5A, Max Junction Temperature (Tj)=150°C, Max Power Dissipation=300mW, Supplier Part Number=641-1790-1-ND, Transition Frequency=100MHz, Category=BJTs, Collector Emitter Voltage (VCEO)=25V, ComponentLink1Description=https://datasheet.octopart.com:443/SS8050-G-Comchip-datasheet-180131983.pdf?src-supplier=IHS, ComponentLink1URL=https://datasheet.octopart.com:443/SS8050-G-Comchip-datasheet-180131983.pdf?src-supplier=IHS, ComponentLink2Description=https://datasheet.octopart.com:443/SS8050-G-Comchip-datasheet-155422643.pdf?src-supplier=Upverter, ComponentLink2URL=https://datasheet.octopart.com:443/SS8050-G-Comchip-datasheet-155422643.pdf?src-supplier=Upverter, ComponentLink3Description=https://datasheet.octopart.com:443/SS8050-G-Comchip-datasheet-189767092.pdf?src-supplier=ODG+(Origin+Data+Global), ComponentLink3URL=https://datasheet.octopart.com:443/SS8050-G-Comchip-datasheet-189767092.pdf?src-supplier=ODG+(Origin+Data+Global), Height=1.15mm, hFE Min=40, Lifecycle Status=Production, Manufacturer Part Number=SS8050-G, Max Breakdown Voltage=25V, Max Operating Temperature=150°C, Mounting Technology="Surface Mount", Number of Elements=1, Number of Terminals=3, Power Dissipation=300mW, Pricing="1=0,24, 10=0,148, 100=0,0921, 500=0,06754, 1000=0,05958 (USD)", REACH SVHC=Yes, RoHS=Compliant, Schedule B=8541100070|8541100070|8541100070|8541100070|8541100070, Stock=85486, Supplier=DigiKey
R1 R2 R13 R15 R17 R18 R19 R20 R21: library part RC0402JR-070RL, "GENERAL PURPOSE CHIP RESISTOR Metal Glaze/thick Film, 0.0625W, 0ohm, Surface Mount, 0402", Case Code (Imperial)=0402, LCSC Part=C60485, Manufacturer="Yageo Group", Max Operating Temperature=155°C, Max Power Dissipation=63mW, Min Operating Temperature=-55°C, Power Dissipation=62.5mW, Supplier Part Number=311-0.0JRCT-ND, Temperature Coefficient=200ppm/°C, Tolerance=5%, Voltage Rating=50V, Case/Package=0402, Category="Chip SMD Resistors", China RoHS=Non-Compliant, ComponentLink1Description=https://datasheet.octopart.com:443/RC0402JR-070RL-Yageo-datasheet-182189538.pdf?src-supplier=IHS, ComponentLink1URL=https://datasheet.octopart.com:443/RC0402JR-070RL-Yageo-datasheet-182189538.pdf?src-supplier=IHS, ComponentLink2Description=https://datasheet.octopart.com:443/RC0402JR-070RL-Yageo-datasheet-10408619.pdf?src-supplier=Newark, ComponentLink2URL=https://datasheet.octopart.com:443/RC0402JR-070RL-Yageo-datasheet-10408619.pdf?src-supplier=Newark, ComponentLink3Description=https://datasheet.octopart.com:443/RC0402JR-070RL-Yageo-Group-datasheet-181964826.pdf?src-supplier=Newark, ComponentLink3URL=https://datasheet.octopart.com:443/RC0402JR-070RL-Yageo-Group-datasheet-181964826.pdf?src-supplier=Newark, ComponentLink4Description=https://datasheet.octopart.com:443/RC0402JR-070RL-Yageo-Group-datasheet-190305687.pdf?src-supplier=Future+Electronics, ComponentLink4URL=https://datasheet.octopart.com:443/RC0402JR-070RL-Yageo-Group-datasheet-190305687.pdf?src-supplier=Future+Electronics, ComponentLink5Description=https://datasheet.octopart.com:443/RC0402JR-070RL-Yageo-datasheet-164759695.pdf?src-supplier=Future+Electronics, ComponentLink5URL=https://datasheet.octopart.com:443/RC0402JR-070RL-Yageo-datasheet-164759695.pdf?src-supplier=Future+Electronics, ComponentLink6Description=https://datasheet.octopart.com:443/RC0402JR-070RL-Yageo-datasheet-137700087.pdf?src-supplier=Future+Electronics, ComponentLink6URL=https://datasheet.octopart.com:443/RC0402JR-070RL-Yageo-datasheet-137700087.pdf?src-supplier=Future+Electronics, ComponentLink7Description=https://datasheet.octopart.com:443/RC0402JR-070RL-Yageo-datasheet-12531192.pdf?src-supplier=Seeed+Studio, ComponentLink7URL=https://datasheet.octopart.com:443/RC0402JR-070RL-Yageo-datasheet-12531192.pdf?src-supplier=Seeed+Studio, ComponentLink8Description=https://datasheet.octopart.com:443/RC0402JR-070RL-Yageo-datasheet-8324527.pdf?src-supplier=TME, ComponentLink8URL=https://datasheet.octopart.com:443/RC0402JR-070RL-Yageo-datasheet-8324527.pdf?src-supplier=TME, ComponentLink9Description=https://datasheet.octopart.com:443/RC0402JR-070RL-Yageo-datasheet-62067350.pdf?src-supplier=Farnell, ComponentLink9URL=https://datasheet.octopart.com:443/RC0402JR-070RL-Yageo-datasheet-62067350.pdf?src-supplier=Farnell, ComponentLink10Description=https://datasheet.octopart.com:443/RC0402JR-070RL-Yageo-datasheet-8329306.pdf?src-supplier=element14, ComponentLink10URL=https://datasheet.octopart.com:443/RC0402JR-070RL-Yageo-datasheet-8329306.pdf?src-supplier=element14, ComponentLink11Description=https://datasheet.octopart.com:443/RC0402JR-070RL-Yageo-datasheet-505231.pdf?src-supplier=element14, ComponentLink11URL=https://datasheet.octopart.com:443/RC0402JR-070RL-Yageo-datasheet-505231.pdf?src-supplier=element14, ComponentLink12Description=https://datasheet.octopart.com:443/RC0402JR-070RL-Yageo-datasheet-175423674.pdf?src-supplier=SOS+electronic, ComponentLink12URL=https://datasheet.octopart.com:443/RC0402JR-070RL-Yageo-datasheet-175423674.pdf?src-supplier=SOS+electronic, ComponentLink13Description=https://datasheet.octopart.com/RC0402JR-070RL-Yageo-datasheet-73766026.pdf, ComponentLink13URL=https://datasheet.octopart.com/RC0402JR-070RL-Yageo-datasheet-73766026.pdf, ComponentLink14Description=http://sigma.octopart.com:80/conflict_mineral_statement/Yageo-company-3.pdf?src-supplier=Compliance+Statements, ComponentLink14URL=http://sigma.octopart.com:80/conflict_mineral_statement/Yageo-company-3.pdf?src-supplier=Compliance+Statements, ComponentLink15Description=http://sigma.octopart.com:80/rohs_statement/Yageo-company-2.pdf?src-supplier=Compliance+Statements, ComponentLink15URL=http://sigma.octopart.com:80/rohs_statement/Yageo-company-2.pdf?src-supplier=Compliance+Statements, Composition="Thick Film", Contact Plating=Tin, Depth=500µm, Features="Moisture Resistant", Height=350µm, Lead Free="Lead Free", Length=1mm, Lifecycle Status=Production, Manufacturer Part Number=RC0402JR-070RL, Military Standard=Not, Mounting Technology="Surface Mount", Number of Terminals=2, Number of Terminations=2, Packaging="Tape & Reel", Pins=2, Power Rating=63mW, Pricing="1=0,1, 10=0,010, 25=0,0064, 50=0,0054, 100=0,0047, 250=0,00392, 500=0,00346, 1000=0,00304, 5000=0,0023 (USD)", Radiation Hardening=No, REACH SVHC=Yes, RoHS=Compliant, Schedule B="8533290000, 8533290000|8533290000, 8533290000|8533290000|8533290000, 8533290000|8533290000|8533290000|8533290000", Stock=12915395, Supplier=DigiKey, Termination=SMD/SMT, Voltage Rating (DC)=50V, Width=500µm
R3 R4 R14 R16: library part RT0402FRE0727RL, "62.5mW Thin Film Resistor ±50ppm/℃ ±1% 27Ω 0402 Chip Resistor - Surface Mount ROHS", Case Code (Imperial)=0402, Manufacturer="Yageo Group", Max Operating Temperature=155°C, Max Power Dissipation=63mW, Min Operating Temperature=-55°C, Power Rating=62.5mW, Supplier Part Number=YAG3343CT-ND, Temperature Coefficient=50ppm/°C, Tolerance=1%, Voltage Rating=50V, Case/Package=0402, Category="Chip SMD Resistors", China RoHS=Non-Compliant, ComponentLink1Description=https://datasheet.octopart.com:443/RT0402FRE0727RL-Yageo-datasheet-176402239.pdf?src-supplier=Future+Electronics, ComponentLink1URL=https://datasheet.octopart.com:443/RT0402FRE0727RL-Yageo-datasheet-176402239.pdf?src-supplier=Future+Electronics, ComponentLink2Description=https://datasheet.octopart.com:443/RT0402FRE0727RL-Yageo-datasheet-169971040.pdf?src-supplier=Future+Electronics, ComponentLink2URL=https://datasheet.octopart.com:443/RT0402FRE0727RL-Yageo-datasheet-169971040.pdf?src-supplier=Future+Electronics, ComponentLink3Description=https://datasheet.octopart.com:443/RT0402FRE0727RL-Yageo-datasheet-164439670.pdf?src-supplier=Future+Electronics, ComponentLink3URL=https://datasheet.octopart.com:443/RT0402FRE0727RL-Yageo-datasheet-164439670.pdf?src-supplier=Future+Electronics, ComponentLink4Description=https://datasheet.octopart.com:443/RT0402FRE0727RL-Yageo-datasheet-96443642.pdf?src-supplier=Upverter, ComponentLink4URL=https://datasheet.octopart.com:443/RT0402FRE0727RL-Yageo-datasheet-96443642.pdf?src-supplier=Upverter, ComponentLink5Description=https://datasheet.octopart.com:443/RT0402FRE0727RL-Yageo-Group-datasheet-141265893.pdf?src-supplier=ODG+(Origin+Data+Global), ComponentLink5URL=https://datasheet.octopart.com:443/RT0402FRE0727RL-Yageo-Group-datasheet-141265893.pdf?src-supplier=ODG+(Origin+Data+Global), ComponentLink6Description=https://datasheet.octopart.com/RT0402FRE0727RL-Yageo-datasheet-86813807.pdf, ComponentLink6URL=https://datasheet.octopart.com/RT0402FRE0727RL-Yageo-datasheet-86813807.pdf, ComponentLink7Description=http://sigma.octopart.com:80/conflict_mineral_statement/Yageo-company-3.pdf?src-supplier=Compliance+Statements, ComponentLink7URL=http://sigma.octopart.com:80/conflict_mineral_statement/Yageo-company-3.pdf?src-supplier=Compliance+Statements, ComponentLink8Description=http://sigma.octopart.com:80/rohs_statement/Yageo-company-2.pdf?src-supplier=Compliance+Statements, ComponentLink8URL=http://sigma.octopart.com:80/rohs_statement/Yageo-company-2.pdf?src-supplier=Compliance+Statements, Composition="Thin Film", Depth=500µm, Features="Moisture Resistant", Height=300µm, Lead Free="Lead Free", Length=1mm, Lifecycle Status=Production, Manufacturer Part Number=RT0402FRE0727RL, Military Standard=Not, Mounting Technology="Surface Mount", Number of Terminals=2, Number of Terminations=2, Pricing="1=0,1, 10=0,014, 25=0,0132, 50=0,0126, 100=0,0119, 250=0,01108, 500=0,01044, 1000=0,00987, 5000=0,00871 (USD)", REACH SVHC=Yes, RoHS=Compliant, Schedule B="8533210045, 8533210045|8533210045|8533210045|8533210045|8533210045", Stock=113870, Supplier=DigiKey, Termination=SMD/SMT, Voltage Rating (DC)=50V, Width=500µm, Working Voltage=50V